# Altium PCB LANDING-STATION-PCB.PcbDoc
Units mm, origin at the board's own origin, x right, y up, seen from the top; angles counter-clockwise.
Board outline 100.5 x 100.5 mm, 2 copper layers (Top Layer, Bottom Layer); 59 components, 32 nets, 204 pads, 6 vias.
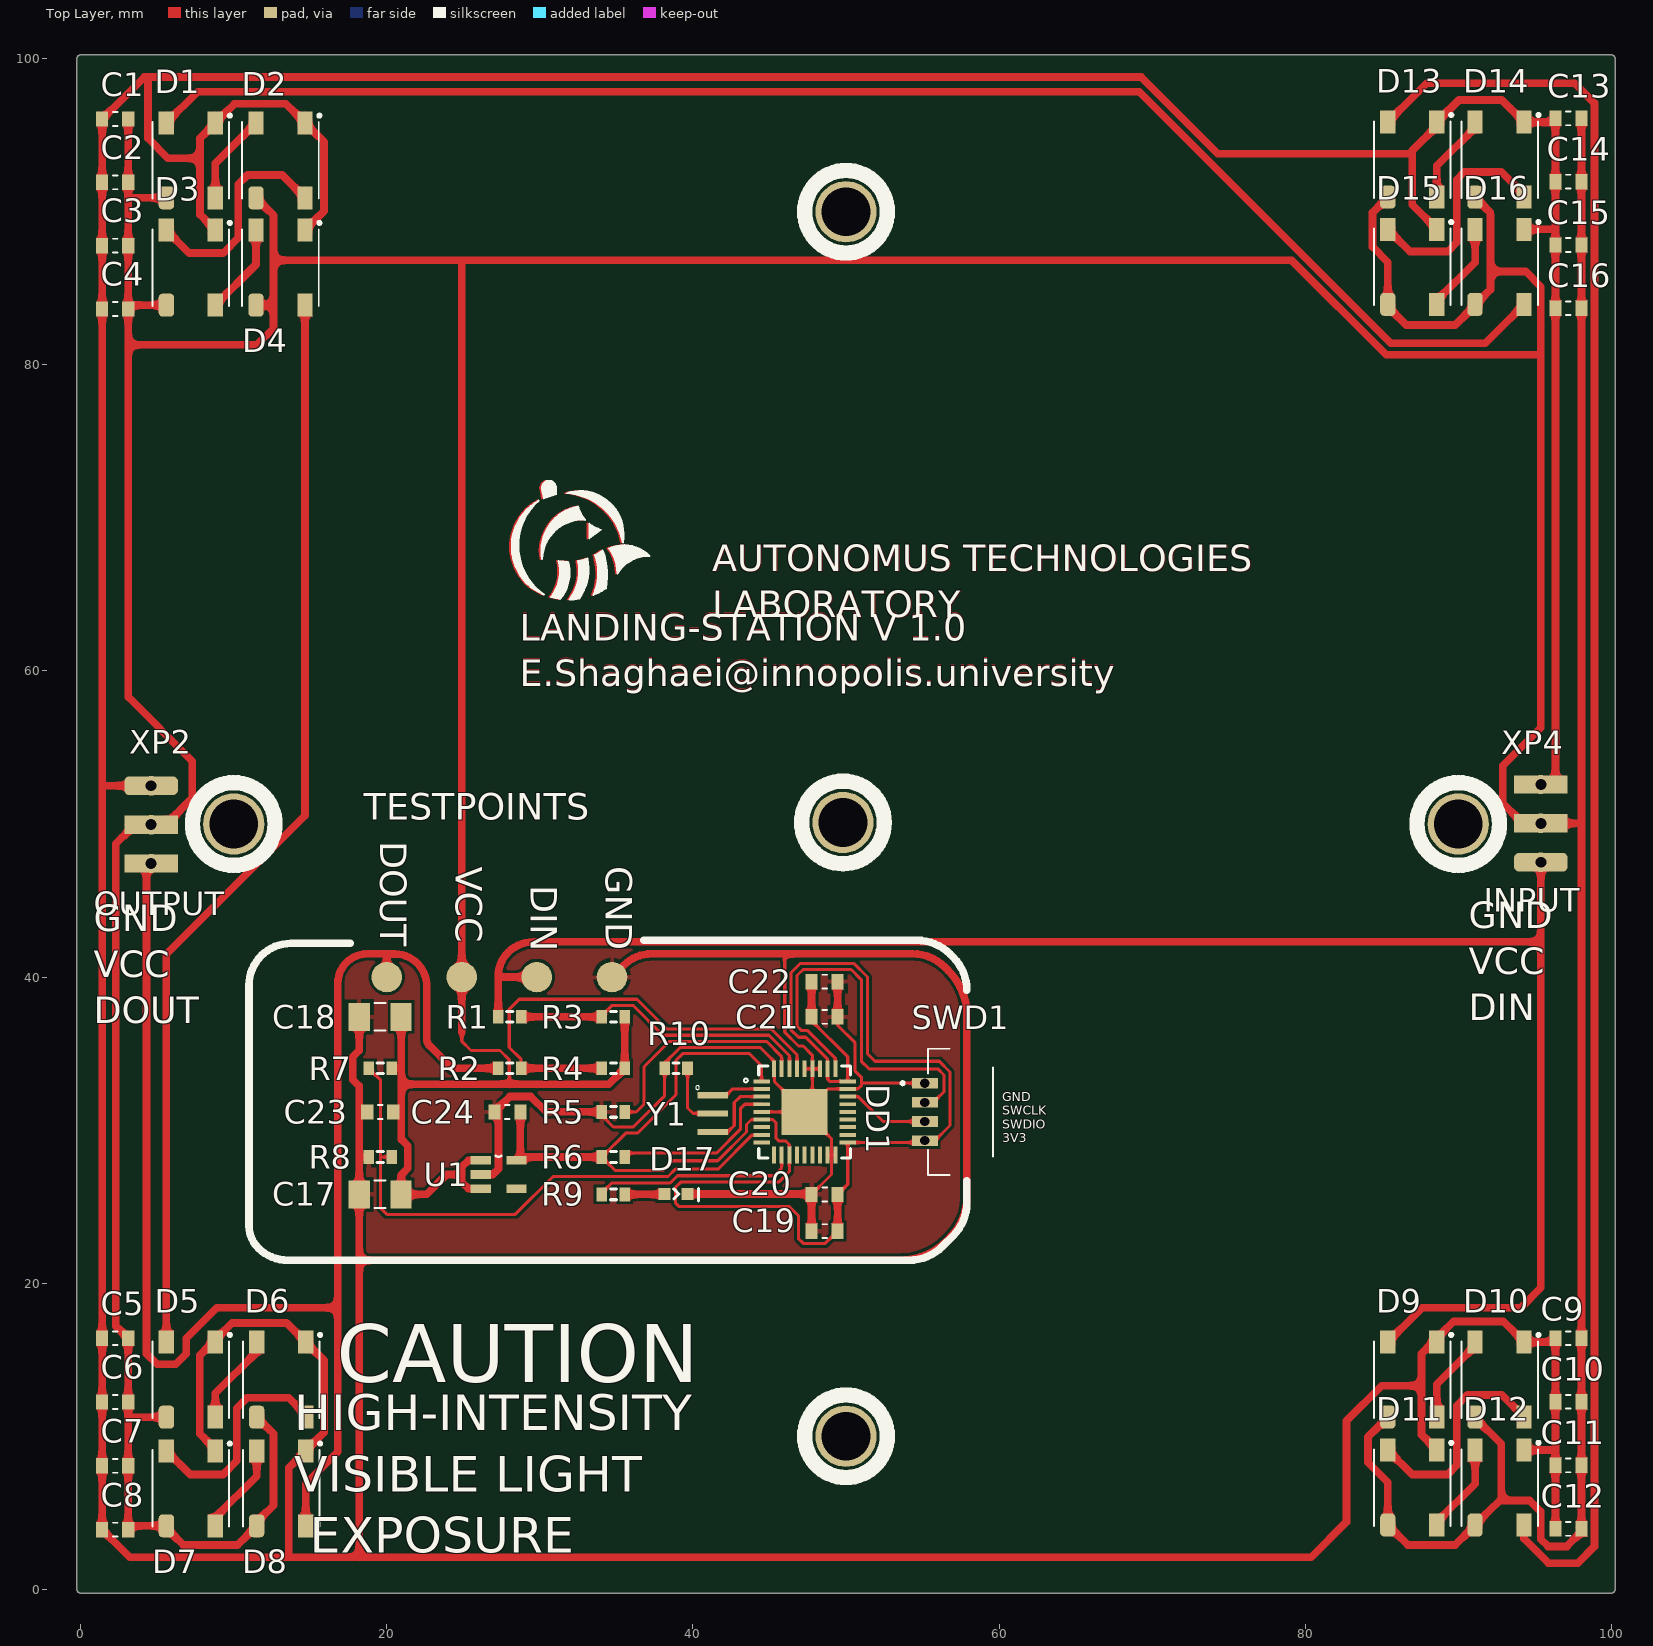
[diagram p0: Top Layer view]
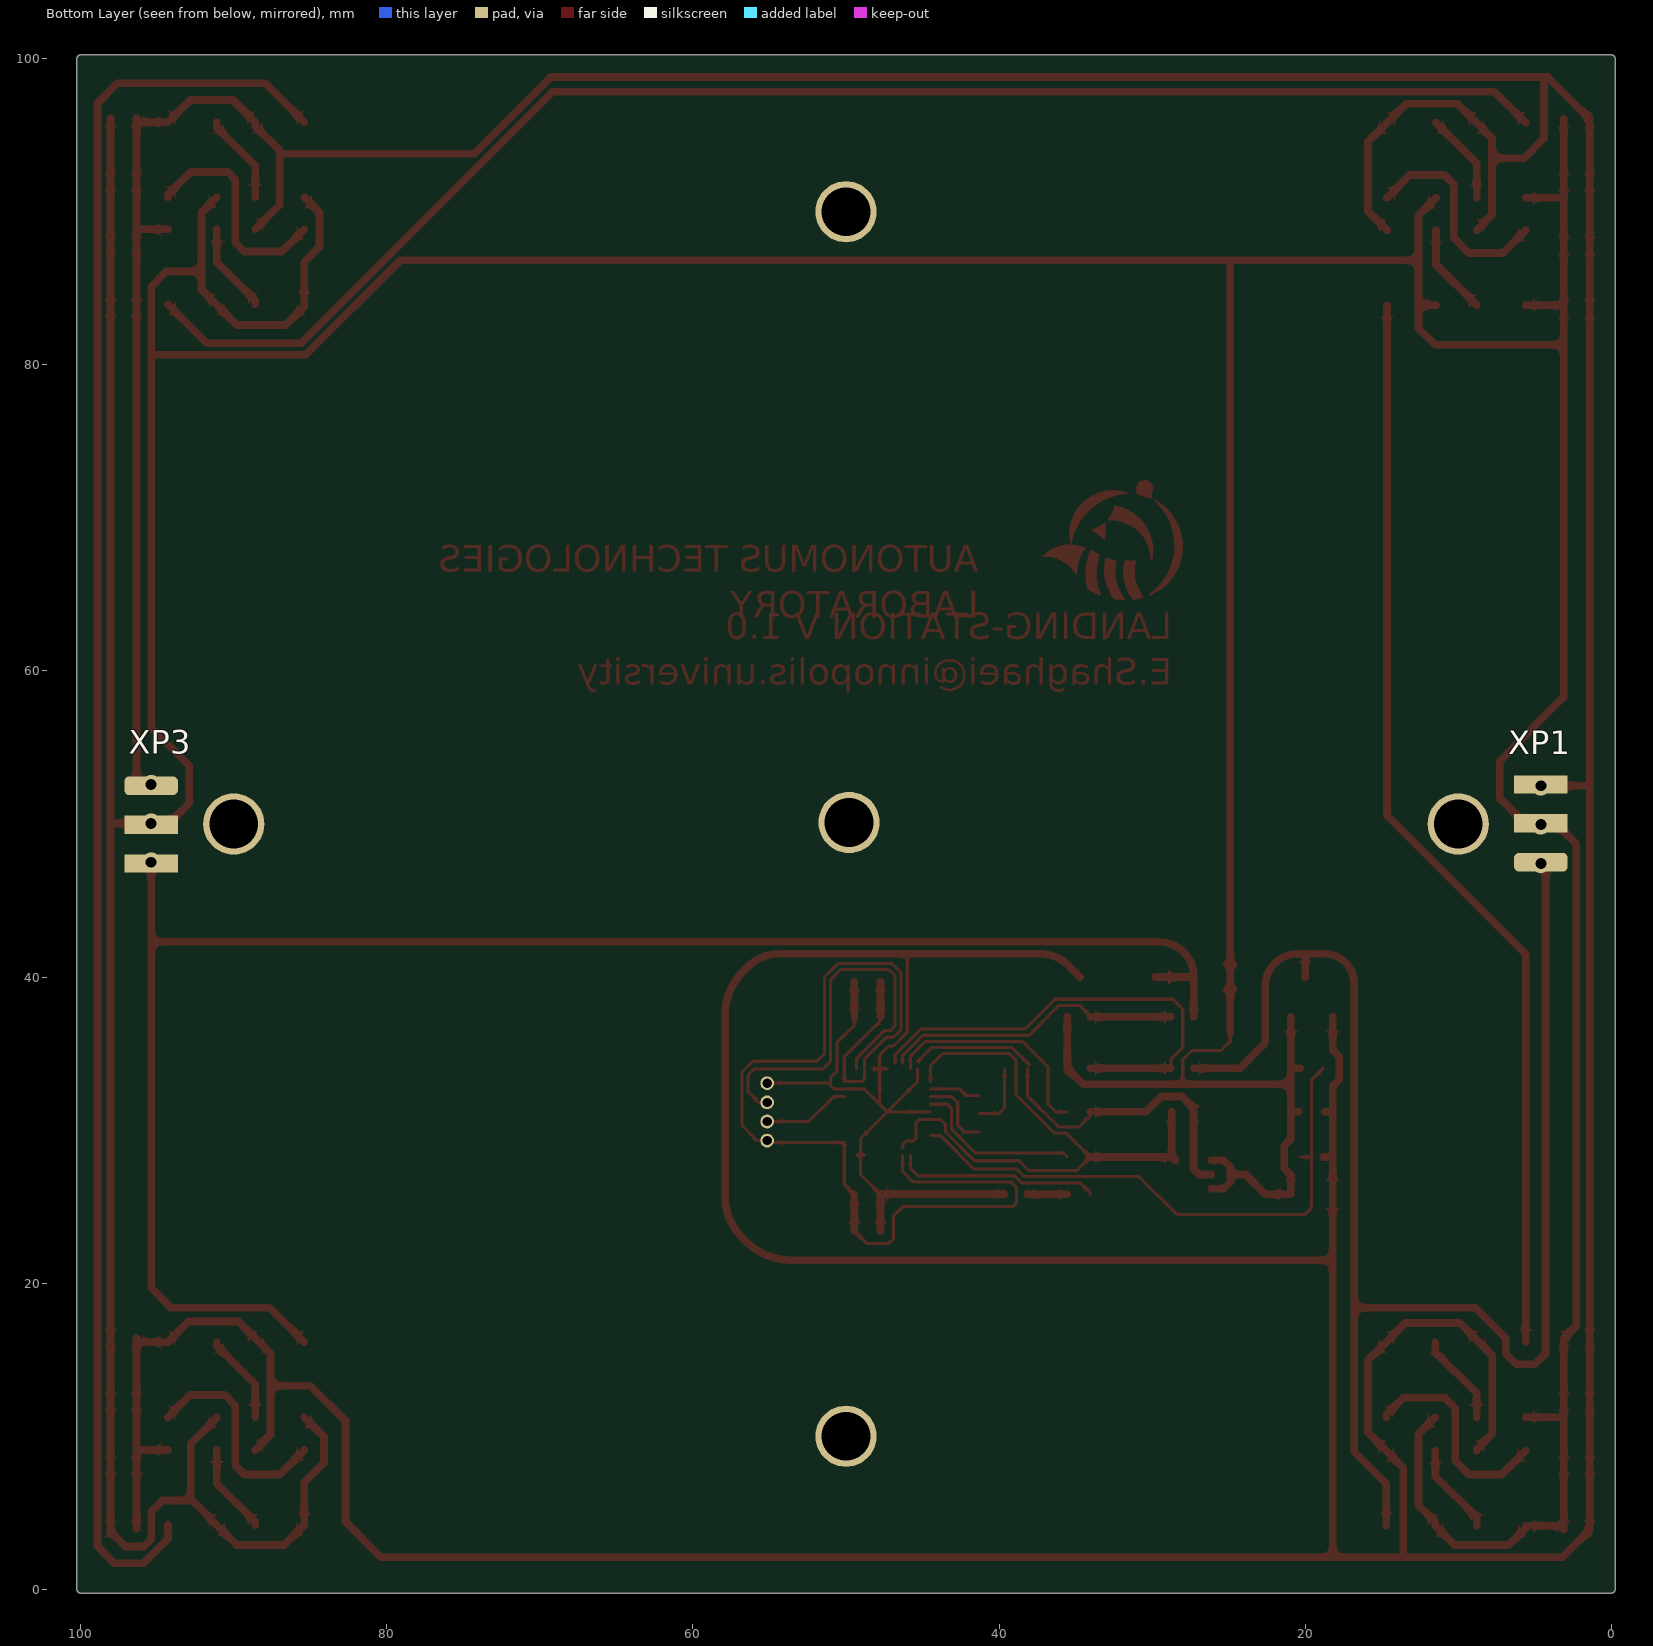
[diagram p1: Bottom Layer view, seen from below]
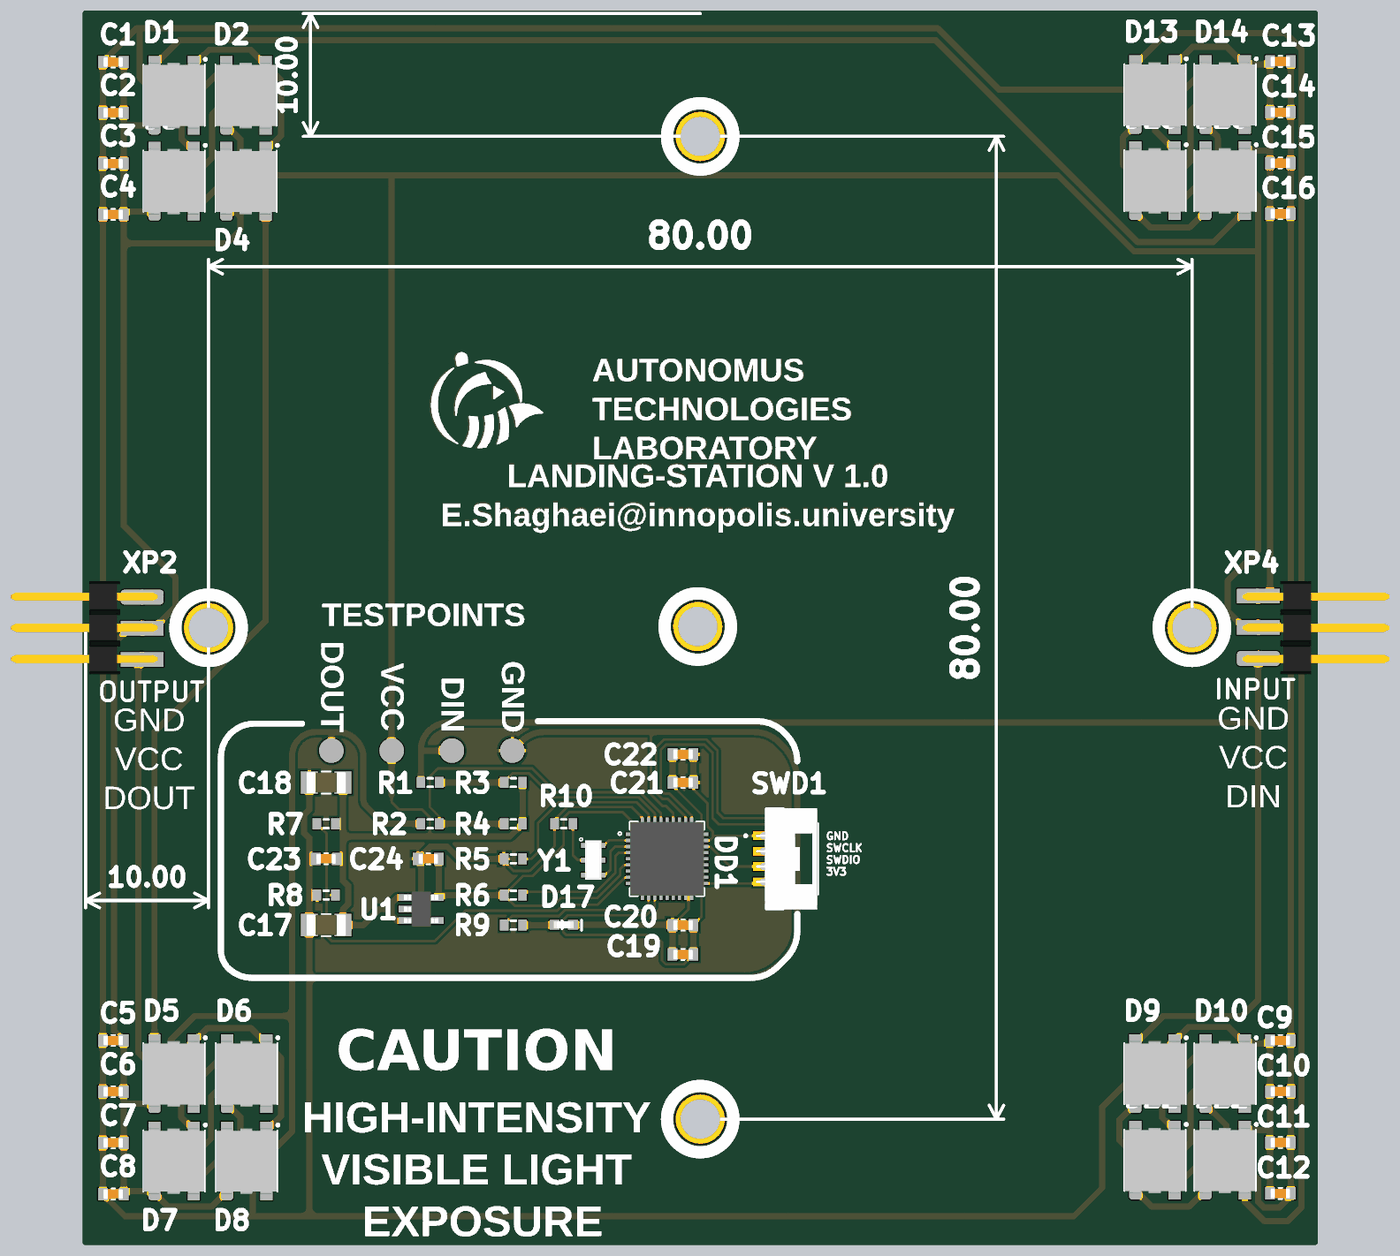
[diagram p2: 3D render of the assembled board from above, using the file's embedded part models]

## Layer stack, top to bottom
Top Solder: solder mask 0.0102, Solder Resist, Dk 3.5
Top Layer: signal copper 0.0356
Dielectric 1: dielectric 0.32, FR-4, Dk 4.8
Bottom Layer: signal copper 0.0356
Bottom Solder: solder mask 0.0102, Solder Resist, Dk 3.5

## Board outline
-0.25,0 ccw(c0,0) 0,-0.25 100,-0.25 ccw(c100,0) 100.25,0 100.25,100 ccw(c100,100) 100,100.25 0,100.25 ccw(c0,100) -0.25,100

## Design rules (kind name [scope] priority, off if disabled: settings)
Clearance [All] p1: gap=0.2 ignorepadtopadclearanceinfootprint=FALSE
PolygonConnect [All] p1: connectstyle=Relief reliefconductorwidth=0.254 reliefentries=4 polygonreliefangle="90 Angle" airgapwidth=0.254
RoutingVias [All] p1: holewidth=0.3 width=0.7 viastyle="Through Hole" minholewidth=0.3 minwidth=0.7 maxholewidth=1 maxwidth=1.5
SolderMaskExpansion [All] p1: expansion=0.102 istentingtop=FALSE
Width [All] p1: maxlimit=5 minlimit=0.17 preferedwidth=0.2
30 further rules are at their usual default settings.

## Components (designator, comment, footprint, x,y, rotation, side; value= is the part's Value field where it differs from the comment)
C1 "GX035C104MAT2-500" *CAPC1608X90 2.25,96.056 r180 top value=0.1u
C2 "GX035C104MAT2-500" *CAPC1608X90 2.25,91.921 r180 top value=0.1u
C3 "GX035C104MAT2-500" *CAPC1608X90 2.25,87.785 r180 top value=0.1u
C4 "GX035C104MAT2-500" *CAPC1608X90 2.25,83.65 r180 top value=0.1u
C5 "GX035C104MAT2-500" *CAPC1608X90 2.25,16.4 r180 top value=0.1u
C6 "GX035C104MAT2-500" *CAPC1608X90 2.25,12.233 r180 top value=0.1u
C7 "GX035C104MAT2-500" *CAPC1608X90 2.25,8.067 r180 top value=0.1u
C8 "GX035C104MAT2-500" *CAPC1608X90 2.25,3.9 r180 top value=0.1u
C9 "GX035C104MAT2-500" *CAPC1608X90 97.2,16.4 r180 top value=0.1u
C10 "GX035C104MAT2-500" *CAPC1608X90 97.2,12.25 r180 top value=0.1u
C11 "GX035C104MAT2-500" *CAPC1608X90 97.2,8.1 r180 top value=0.1u
C12 "GX035C104MAT2-500" *CAPC1608X90 97.2,3.95 r180 top value=0.1u
C13 "GX035C104MAT2-500" *CAPC1608X90 97.2,96.1 r180 top value=0.1u
C14 "GX035C104MAT2-500" *CAPC1608X90 97.2,91.967 r180 top value=0.1u
C15 "GX035C104MAT2-500" *CAPC1608X90 97.2,87.833 r180 top value=0.1u
C16 "GX035C104MAT2-500" *CAPC1608X90 97.2,83.7 r180 top value=0.1u
C17 "GRM31CR61A476KE15L" *CAPC3216X125N 19.569,25.8 r0 top value=47u
C18 "GRM31CR61A476KE15L" *CAPC3216X125N 19.569,37.4 r0 top value=47u
C19 "GX035C104MAT2-500" *CAPC1608X90 48.6,23.4 r180 top value=0.1u
C20 "GX035C104MAT2-500" *CAPC1608X90 48.6,25.8 r180 top value=0.1u
C21 "GX035C104MAT2-500" *CAPC1608X90 48.6,37.4 r0 top value=0.1u
C22 "GX035C104MAT2-500" *CAPC1608X90 48.6,39.7 r0 top value=0.1u
C23 "GX035C104MAT2-500" *CAPC1608X90 19.569,31.19 r180 top value=0.1u
C24 "GX035C104MAT2-500" *CAPC1608X90 27.879,31.19 r180 top value=0.1u
D1 "WS2812" LED_WS2812 7.2,93.356 r90 top
D2 "WS2812" LED_WS2812 13.053,93.356 r90 top
D3 "WS2812" LED_WS2812 7.2,86.35 r90 top
D4 "WS2812" LED_WS2812 13.053,86.35 r90 top
D5 "WS2812" LED_WS2812 7.2,13.7 r90 top
D6 "WS2812" LED_WS2812 13.1,13.7 r90 top
D7 "WS2812" LED_WS2812 7.2,6.6 r90 top
D8 "WS2812" LED_WS2812 13.1,6.6 r90 top
D9 "WS2812" LED_WS2812 87,13.7 r90 top
D10 "WS2812" LED_WS2812 92.7,13.7 r90 top
D11 "WS2812" LED_WS2812 87,6.65 r90 top
D12 "WS2812" LED_WS2812 92.7,6.65 r90 top
D13 "WS2812" LED_WS2812 87,93.4 r90 top
D14 "WS2812" LED_WS2812 92.7,93.4 r90 top
D15 "WS2812" LED_WS2812 87,86.4 r90 top
D16 "WS2812" LED_WS2812 92.7,86.4 r90 top
D17 "0603-LED-BLUE" *LEDM1608X80_LTE-C1906R-14(Primary) 38.9,25.824 r180 top
DD1 "STM32F103T8" *QFN50P600X600X100-37N 47.3,31.19 r0 top
R1 "Res3" J1-0603 28.029,37.4 r180 top value=330
R2 "Res3" J1-0603 28.029,34.04 r180 top value=330
R3 "Res3" J1-0603 34.8,37.4 r0 top value=10K
R4 "Res3" J1-0603 34.8,34.04 r0 top value=10K
R5 "RC0603FR-0710KL" J1-0603 34.8,31.19 r0 top value=10k
R6 "RC0603FR-0710KL" J1-0603 34.8,28.24 r0 top value=10k
R7 "RC0603FR-0710KL" J1-0603 19.569,34.04 r0 top value=10k
R8 "RC0603FR-0710KL" J1-0603 19.569,28.24 r0 top value=10k
R9 "Res3" J1-0603 34.8,25.8 r0 top value=330
R10 "RC0603FR-0710KL" J1-0603 38.9,34.04 r0 top value=0R
SWD1 "BM04B-GHS-TBT(LF)(SN)(N)" JST_BM04B-GHS-holes 58.5,31.19 r90 top
U1 "SPX3819M5-L-3-3/TR" *SOT95P280X145-5N 27.3,27.1 r0 top value=3V3
XP1 "Header 3" "HDR Side 3 pin" 4.602,50.04 r90 bottom
XP2 "Header 3" "HDR Side 3 pin" 4.602,49.96 r270 top
XP3 "Header 3" "HDR Side 3 pin" 95.398,49.96 r270 bottom
XP4 "Header 3" "HDR Side 3 pin" 95.398,50.04 r90 top
Y1 "CSTCE8M00G55-R0" *OSC_CSTCE8M00G55-R0 41.3,31.077 r270 top

## Footprints (in the part's own frame and the unit in brackets; to place one, negate y for a bottom-side part, rotate by r counter-clockwise, add the part's x,y. Pads: shape width x height; smd on the part's side, far side on the other; paste and mask are expansions set on the pad)
*CAPC1608X90 [mm]
  rect 0.8x1 smd: 1(-0.85,0) 2(0.85,0)
  silkscreen extent -0.15,-0.45 0.15,0.45, body extent -0.8,-0.4 0.8,0.41, height 0.88
*CAPC3216X125N [mm]
  rect 1.38x1.82 smd: 1(-1.369,0) 2(1.369,0)
  silkscreen extent -0.36,-0.9 0.36,0.9, body extent -1.6,-0.87 1.6,0.87, height 1.71
*LEDM1608X80_LTE-C1906R-14(Primary) [mm]
  rect 0.8x0.8 smd: A(0.75,0) C(-0.75,0)
  silkscreen extent -1.45,-0.38 0.16,0.45, body extent -0.8,-0.3 0.8,0.3, height 1.15
*OSC_CSTCE8M00G55-R0 [mm]
  rect 0.4x2 smd: 1(-1.2,0) 2(0,0) 3(1.2,0)
  silkscreen extent -1.83,-1.13 -1.57,-0.87, body extent -1.6,-0.65 1.6,0.65, height 1
*QFN50P600X600X100-37N [mm]
  rect 1.08x0.26 smd: 1(-2.815,2) 2(-2.815,1.5) 3(-2.815,1) 4(-2.815,0.5) 5(-2.815,0) 6(-2.815,-0.5) 7(-2.815,-1) 8(-2.815,-1.5) 9(-2.815,-2) 19(2.815,-2) 20(2.815,-1.5) 21(2.815,-1) 22(2.815,-0.5) 23(2.815,0) 24(2.815,0.5) 25(2.815,1) 26(2.815,1.5) 27(2.815,2)
  rect 0.26x1.08 smd: 10(-2,-2.815) 11(-1.5,-2.815) 12(-1,-2.815) 13(-0.5,-2.815) 14(0,-2.815) 15(0.5,-2.815) 16(1,-2.815) 17(1.5,-2.815) 18(2,-2.815) 28(2,2.815) 29(1.5,2.815) 30(1,2.815) 31(0.5,2.815) 32(0,2.815) 33(-0.5,2.815) 34(-1,2.815) 35(-1.5,2.815) 36(-2,2.815)
  rect 3x3 smd: ""(0,0)
  silkscreen extent -3.97,-3 3,3, body extent -3,-3 3,3, height 1
*SOT95P280X145-5N [mil]
  rect 52x22 smd: 1(-46,37) 2(-46,0) 3(-46,-37) 4(46,-37) 5(46,37)
  silkscreen extent -7,46 7,48, body extent -55,-57 55,57, height 57
"HDR Side 3 pin" [mm]
  rrect50% 1.2x3.5 smd: 1(-2.54,0)
  rect 1.2x3.5 smd: 2(0,0) 3(2.54,0)
  body extent -3.85,-10.67 3.77,1.27, height 1.57
J1-0603 [mm] "Chip Resistor, Body 1.6x0.8mm, IPC High Density"
  rect 0.7x0.9 smd: 1(-0.75,0) 2(0.75,0)
  silkscreen extent -0.2,-0.35 0.2,0.35, body extent -0.85,-0.48 0.85,0.48, height 0.9
JST_BM04B-GHS-holes [mm]
  rect 0.7x1.7 / inner rect 0.6x1.7 / far side round 0.9 hole 0.6: 1(1.875,3.35) 2(0.625,3.35) 3(-0.625,3.35) 4(-1.875,3.35)
  silkscreen extent -4.13,-1.1 4.13,4.9, body extent -4.12,-1.02 4.12,3.93, height 4.15
LED_WS2812 [mm]
  rrect50% 1.5x1 smd: 1(-2.45,1.6)
  rect 1.5x1 smd: 2(-2.45,-1.6) 3(2.45,-1.6) 4(2.45,1.6)
  silkscreen extent -2.5,-2.64 3.02,2.5, body extent -2.7,-2.45 2.65,2.5, height 1.5

## Part data
C1 C2 C3 C4 C5 C6 C7 C8 C9 C10 C11 C12 C13 C14 C15 C16 C19 C20 C21 C22 C23 C24: "Cap Thin Film 0.1uf 50v 0603", Package="0603 AVX", MF=AVX, Pacage Metric=1608, SnapEDA_Link=https://www.snapeda.com/parts/GX035C104MAT2-500/AVX/view-part/?ref=snap, Type=SMD
  C1 C2 C3 C4 C5 C6 C7 C8 C9 C10 C11 C12 C13 C14 C15 C16 C19 C20 C21 C22: MP="GX035C104MAT2-500 or CL10B104JB8NNNC"
  C23 C24: MP=GX035C104MAT2-500
C17 C18: "Multilayer Ceramic Capacitor, GRM Series, 47 - F, - 10%, X5R, 10 V, 1206 [3216 Metric]", Package="1206 Murata Electronics", MF="Murata Electronics", MP=GRM31CR61A476KE15L, SnapEDA_Link=https://www.snapeda.com/parts/GRM31CR61A476KE15L/Murata%20Electronics%20North%20America/view-part/?ref=snap, Type=SMD
D1 D2 D3 D4 D5 D6 D7 D8 D9 D10 D11 D12 D13 D14 D15 D16: "Addressable Lighting - 5 LED Discrete Serial _Shift Register_ Red, Green, Blue _RGB_ 5.00mm Dia", Package="SparkFun Electronics", Availability=Unavailable, ChipDip_Link=https://www.chipdip.ru/product/ws2812b, HelpURL=https://static.chipdip.ru/lib/554/DOC001554925.pdf, MF="SparkFun Electronics", MP=WS2812, Price=None, SnapEDA_Link=https://www.snapeda.com/parts/WS2812/SparkFun%20Electronics/view-part/106391/?ref=snap
D17: library part LTE-C1906R-14, "LED IrLED Chip LED 2-Pin SMD T/R", Package="0603 Lite-On", MP=0603-LED-BLUE, SnapEDA_Link=https://www.snapeda.com/parts/LTE-C1906R-14/Lite-On%20Inc./view-part/?ref=snap, Type=SMD
DD1: "STM32F103T8U6, Микроконтроллер 32BIT ARM 64K FLASH [VFQFPN-36]", Package=VFQFPN-36, ChipDip_Link=https://www.chipdip.ru/product/stm32f103t8u6-2, HelpURL=http://www.st.com/stonline/products/literature/ds/13587.pdf, MF=STM, MP=STM32F103T8U6, SnapEDA_Link=https://www.snapeda.com/parts/STM32F103T8U6TR/STMicroelectronics/view-part/?ref=search&t=STM32F103T8U6, Type=SMD
R1 R2 R3 R4 R9: "Resistor", Package=R0603, Pacage Metric=1608, Type=SMD
  R1 R2 R3 R4: ChipDip_Link=https://www.chipdip.ru/product0/9000079736, HelpURL=https://www.chipdip.ru/product0/9000079736, MP="4.7K 1% 0603"
  R9: ChipDip_Link=https://www.chipdip.ru/product0/9000079628, HelpURL=https://www.chipdip.ru/product0/9000079628, MP=RC0603FR-07330RL
R5 R6 R7 R8 R10: "10 kOhms 1 0.1 W 1 10 W Chip Resistor 0603 1608 Metric Thick Film", Package=R0603, ChipDip_Link=https://www.chipdip.ru/product0/9000079736, HelpURL=https://www.chipdip.ru/product0/9000079736, MF="Yageo or NXP", MP="10K 1% 0603", Pacage Metric=1608, SnapEDA_Link=https://www.snapeda.com/parts/RC0603FR-0710KL/Yageo/view-part/?ref=dk&t=RC0603FR-0710KL&con_ref=None, Type=SMD
SWD1: "Conn Shrouded Header HDR 4 POS 1.25mm Solder ST SMD Reel", Package=None, Instructions="Do not install", MF="JST Sales", MP=SM04B-GHS-TB(LF)(SN), SnapEDA_Link=https://www.snapeda.com/parts/BM04B-GHS-TBT%28LF%29%28SN%29%28N%29/JST%20Sales%20America%20Inc./view-part/?ref=snap, System=Connector, Type=SMD
U1: library part SPX3819M5-L, "Low Dropout Voltage Regulator, Adjustable 0.5A, В±1%, 2.5 to 16 Vin, 5-Pin SOT-23", Package="SOT-23-5 Exar", ChipDip_Link=https://www.chipdip.ru/product1/8003455237, HelpURL=http://www.farnell.com/datasheets/2614478.pdf, MF="MaxLinear, Inc.", MP=SPX3819M5-L-3-3/TR, SnapEDA_Link=https://www.snapeda.com/parts/SPX3819M5-L/MaxLinear%2C%20Inc./view-part/?ref=snap, Type=SMD
XP1 XP2 XP3 XP4: "Header, 3-Pin", LatestRevisionDate=17-Jul-2002, LatestRevisionNote="Re-released for DXP Platform.", Publisher="Altium Limited"
Y1: "Ceramic Resonator 8MHz ??0.5% _Tol_ ??0.2% _Stability_ 33pF 40Ohm 3-Pin CSMD T/R", Package="SMD-3 Murata", ChipDip_Link=https://www.chipdip.ru/product1/8001783721, HelpURL=https://www.murata.com/en-eu/api/pdfdownloadapi?cate=&partno=CSTCE8M00G55-R0, MF=Murata, MP=CSTCE8M00G55-R0, SnapEDA_Link=https://www.snapeda.com/parts/CSTCE8M00G55-R0/Murata%20Electronics%20North%20America/view-part/?ref=snap, Type=SMD

## Free pads (board coordinates)
  round 2 smd: 5(29.8,40) 6(19.998,40) 8(24.899,40) 9(34.71,40)
  round 4 hole 3.2: ""(10,50) ""(49.8,50.1) ""(50,10) ""(50,90) ""(90,50)

## Via types
v1: diameter 1.27, hole 0.711, Top Layer to Bottom Layer, 6 vias

## Nets (pads, with @x,y where several pads share a name; then routed paths per layer and width w, separated by ;. In a path a pad name is that pad's centre, name@x,y a point inside that pad or via, vN(x,y) a via of type N, cw(c..) or ccw(c..) an arc to the next point about the centre after c; other vN are vias at no path point)
3.3: C19.1 C20.1 C21.1 C22.1 C24.1 DD1.1 DD1.6 DD1.12 DD1.19 DD1.27 DD1.29 R6.1 SWD1.4 U1.5 | length 113.5
  Top Layer w0.2: DD1.1 44.485,34.215 43.7,35 39.333,35 38.895,34.562 38.895,32.316 36.379,29.8 35.61,29.8 R6.1 34.923,27.367 38.067,27.367 38.7,28 41.617,28 43.5,29.883 43.5,30.364 43.826,30.69 DD1.6 45.218,30.69 45.415,30.493 45.415,29.485 45.6,29.3 46.048,29.3 46.304,29.044 DD1.12@46.304,28.826 ; DD1.12 46.3,27.3 45.6,26.6 39.2,26.6 38.85,26.25 38.85,25.25 39.1,25 46.3,25 46.9,24.4 46.9,22.9 47.2,22.6 48.65,22.6 C19.1 ; C21.1 47.75,37.15 50.115,34.785 DD1.27 50.105,33.2 50.07,33.165 48.959,33.165 48.8,33.324 DD1.29 48.8,34.634 47.4,36.034 47.367,36.067 46.899,36.067 46.4,36.566 46.4,40.266 46.934,40.8 47.034,40.9 50.5,40.9 51.4,40 51.4,35 51.9,34.5 56.1,34.5 56.8,33.8 56.8,30.3 55.815,29.315 SWD1.4 55.025,29.19 DD1.19 50.115,26.465 C20.1
  Top Layer w0.5: U1.5 U1.5@28.669,28.24 ; C24.1 28.729,28.3 U1.5@28.669,28.24 ; R6.1 U1.5@28.669,28.24 ; C21.1 C22.1 ; C19.1 C20.1
ADC_5V: DD1.8 R7.1 R8.2 | length 37.4
  Top Layer w0.2: R7.1 19.6,33.259 19.6,28.2 ; R8.2 19.64,28.24 19.6,28.2 ; DD1.8 44.455,29.66 43.843,29.66 41.635,27.453 38.853,27.453 38.367,26.967 30.867,26.967 28.4,24.5 20,24.5 19.6,24.9 19.6,28.2
BOOT0: DD1.35 R5.2 | length 14.8
  Top Layer w0.2: R5.2 36.29,31.19 36.8,31.7 36.8,34.134 38.466,35.8 44.8,35.8 45.8,34.8 DD1.35
DIN: D9.4 pad.5 R1.2 XP3.3 XP4.1 | length 113.9
  Top Layer w0.5: R1.2 27.279,40.062 ; pad.5 27.429,40 cw(c27.429,40.212) 27.279,40.062 ; D9.4 87.65,18.4 94.1,18.4 95.398,19.698 95.398,42.3 ; v1(95.398,47.5) 95.398,42.3 ; 27.279,40.062 cw(c29.465,40.062) 27.919,41.608 cw(c29.59,39.937) 29.59,42.3 95.398,42.3
DOUT: D8.2 pad.6 R2.2 XP1.1 XP2.3 | length 101.9
  Top Layer w0.5: v1(4.602,47.42) 4.3,47.118 4.3,15.4 5,14.7 6.2,14.7 6.9,15.4 6.9,16.4 8.9,18.4 16.8,18.4 ; D8.2 14.7,6.9 16.8,9 16.8,18.4 ; pad.6 19.998,41.398 20,41.4 ; 20,41.504 20.522,41.504 cw(c20.522,39.42) 22.6,39.576 22.6,35.983 ccw(c23.283,35.983) 22.8,35.5 24.26,34.04 R2.2 ; 20,41.516 18.719,41.516 ccw(c18.719,39.597) 16.8,39.588 16.8,18.4
GND: C1.2 C2.2 C3.2 C4.2 C5.2 C6.2 C7.2 C8.2 C9.2 C10.2 C11.2 C12.2 C13.2 C14.2 C15.2 C16.2 C17.1 C18.1 C19.2 C20.2 C21.2 C22.2 C23.2 C24.2 D1.3 D2.3 D3.3 D4.3 D5.3 D6.3 D7.3 D8.3 D9.3 D10.3 D11.3 D12.3 D13.3 D14.3 D15.3 D16.3 D17.C DD1. DD1.5 DD1.17 DD1.18 DD1.26 DD1.30 DD1.31 DD1.32 DD1.36 pad.9 R5.1 R8.1 R10.1 SWD1.1 U1.2 XP1.3 XP2.1 XP3.1 XP4.3 | length 633
  Top Layer w0.2: R5.1 34.05,30.95 34.8,30.2 36.1,30.2 38.15,32.25 R10.1 ; R10.1@38.029,34.261 39.168,35.4 44.4,35.4 DD1.36@45.328,34.472 ; DD1.5 DD1. ; DD1.36@45.325,34.005 45.325,33.165 DD1. ; 45.985,41.564 cw(c45.949,41.528) 46,41.528 46,41.516 46,36.4 46.9,35.5 47.2,35.5 47.8,34.9 DD1.31 ; DD1.32 DD1.31 ; C20.2 49.05,27.1 49.05,28.375 ; DD1.30 DD1.31 ; DD1.17 49.05,28.375 ; DD1.18 49.05,28.375 ; C21.2 49.45,36.85 50.6,35.7 50.6,33.851 51.025,33.427 51.025,33.065 ; SWD1.1 51.025,33.065 ; DD1. DD1.@47.8,31.69 ; DD1. 49.05,29.44 49.05,28.375 ; DD1.@47.8,31.69 48.8,32.69 DD1.26 50.773,32.69 51.025,32.942 51.025,33.065 ; DD1.@47.8,31.69 DD1.31
  Top Layer w0.5: v1(4.602,52.5) 1.5,52.5 1.4,52.4 ; D7.3 8.8,9.146 7.776,10.17 7.776,15.276 9.904,17.404 13.446,17.404 D6.3 15.9,14.95 15.9,10.25 D8.3 13.6,7.95 13.6,2.2 ; D3.3 7.8,89.8 7.8,89.944 7.796,89.948 7.796,93.5 ; D4.3 15.9,90.047 15.9,94.559 D2.3 13.399,97.06 10.054,97.06 D1.3 7.796,94.802 7.796,93.5 ; C18.1 18.2,35.19 18.179,35.19 17.769,34.78 17.769,33.3 18.179,32.89 18.2,32.89 18.2,31.2 ; C23.2 18.21,31.19 18.2,31.2 ; R8.1 18.24,28.24 18.2,28.2 ; U1.2 26.915,27.1 27.3,27.485 27.3,31.461 28.032,32.193 29.407,32.193 30.41,31.19 R5.1 ; pad.9 35.482,40.772 cw(c37.278,38.976) 37.278,41.516 45.985,41.516 46,41.516 54.367,41.516 cw(c54.367,38.58) 56.444,40.656 56.7,40.4 cw(c53.803,37.503) 57.9,37.503 57.9,25.656 cw(c54.144,25.656) 56.8,23 56.544,22.744 cw(c53.541,25.747) 53.541,21.5 18.2,21.5 ; D17.C 47.726,25.824 C20.2 C19.2 ; C21.2 C22.2 ; 86.9,93.8 74.3,93.8 69.3,98.8 4.5,98.8 ; D11.3 87.6,10.1 87.6,10.287 87.596,10.291 87.596,13.3 ; D15.3 87,90.45 87,94 88.6,95.6 D13.3 90.05,97.3 92.85,97.3 D14.3 96.1,95.85 C13.2 C14.2 96.35,88.8 ; D12.3 96.25,9.1 96.35,9.2 ; D16.3 96.3,88.85 96.35,88.8 ; v1(95.398,52.58) 96.35,52.58 C16.2 C15.2 96.35,88.8 ; C12.2 C11.2 96.35,9.2 ; 1.4,52.4 C4.2 C3.2 C2.2 C1.2 4.144,98.8 4.5,98.8 ; 1.4,52.4 C5.2 C6.2 C7.2 C8.2 3.2,2.1 13.6,2.1 18.2,2.1 ; 4.5,98.8 4.4,98.7 4.4,94.8 5.7,93.5 7.796,93.5 ; 18.2,2.1 18.2,21.5 ; 18.2,2.1 80.4,2.1 82.7,4.4 82.7,11 85,13.3 87.596,13.3 ; 18.2,21.5 C17.1 18.2,28.2 ; 18.2,28.2 18.2,31.2 ; 87.596,13.3 87.596,15.396 88.6,16.4 89.7,17.5 92.95,17.5 D10.3 96.1,16.15 C9.2 C10.2 96.35,9.2
LED1: DD1.11 R9.1 | length 13.4
  Top Layer w0.2: R9.1 34.05,25.9 34.694,26.544 35.07,26.544 35.076,26.55 36.024,26.55 38.516,26.55 38.986,27.021 45.302,27.021 45.8,27.519 DD1.11
NetD1_2: D1.2 D2.4 | length 6
  Top Layer w0.5: D1.2 8.8,93.153 D2.4
NetD1_4: D1.4 D16.2 | length 97.4
  Top Layer w0.5: D1.4 7.64,97.847 69.153,97.847 85.6,81.4 91.75,81.4 D16.2
NetD2_2: D2.2 D3.4 | length 14.5
  Top Layer w0.5: D3.4 7.1,87.3 9.3,87.3 10.3,88.3 10.3,91.8 10.9,92.4 13.159,92.4 D2.2
NetD3_2: D3.2 D4.4 | length 6
  Top Layer w0.5: D3.2 11.453,86.553 D4.4
NetD4_2: D4.2 D5.4 | length 71.5
  Top Layer w0.5: D5.4 5.6,41.5 14.653,50.553 D4.2
NetD5_2: D5.2 D6.4 | length 6
  Top Layer w0.5: D5.2 8.8,12.8 11.5,15.5 D6.4
NetD6_2: D6.2 D7.4 | length 14.4
  Top Layer w0.5: D7.4 7.15,7.5 9.3,7.5 10.2,8.4 10.2,11.838 10.87,12.509 13.598,12.509 14.7,11.406 D6.2
NetD7_2: D7.2 D8.4 | length 6
  Top Layer w0.5: D7.2 8.8,4.7 11.5,7.4 D8.4
NetD9_2: D9.2 D10.4 | length 5.9
  Top Layer w0.5: D9.2 88.6,13.4 91.1,15.9 D10.4
NetD10_2: D10.2 D11.4 | length 14.6
  Top Layer w0.5: D11.4 87,7.5 89.3,7.5 89.9,8.1 89.9,12 90.6,12.7 92.85,12.7 D10.2
NetD11_2: D11.2 D12.4 | length 5.9
  Top Layer w0.5: D11.2 88.6,4.4 91.1,6.9 D12.4
NetD12_2: D12.2 D13.4 | length 116
  Top Layer w0.5: D13.4 87.95,98.4 97.6,98.4 98.9,97.1 98.9,2.8 97.8,1.7 95.9,1.7 94.3,3.3 D12.2
NetD13_2: D13.2 D14.4 | length 5.9
  Top Layer w0.5: D13.2 88.6,93 91.1,95.5 D14.4
NetD14_2: D14.2 D15.4 | length 14.8
  Top Layer w0.5: D15.4 86.85,87.4 89.3,87.4 89.9,88 89.9,92.1 90.4,92.6 92.8,92.6 94.3,91.1 D14.2
NetD15_2: D15.2 D16.4 | length 5.9
  Top Layer w0.5: D15.2 88.6,84.2 91.1,86.7 D16.4
NetD17_A: D17.A R9.2 | length 2.6
  Top Layer w0.5: R9.2 38.126,25.8 D17.A
NetDD1_2: DD1.2 Y1.1 | length 3.4
  Top Layer w0.2: Y1.1 42.177,32.277 42.6,32.7 44.475,32.7 DD1.2
NetDD1_3: DD1.3 Y1.3 | length 5
  Top Layer w0.2: Y1.3 42.277,29.877 42.7,30.3 42.7,31.8 43.09,32.19 DD1.3
NetR10_2: R10.2 Y1.2 | length 4.4
  Top Layer w0.2: R10.2 39.65,31.45 40,31.1 41.277,31.1 Y1.2
NRST: DD1.4 R6.2 | length 11.2
  Top Layer w0.2: R6.2 35.81,28.5 41.548,28.5 43.1,30.052 43.1,31.4 43.39,31.69 DD1.4
SCL/A2: DD1.33 R2.1 R4.1 | length 30.6
  Top Layer w0.2: R2.1 28.779,34.621 28,35.4 28,37.9 28.65,38.55 36.35,38.55 38.3,36.6 45.131,36.6 46.801,34.93 DD1.33@46.801,34.377
  Top Layer w0.5: R2.1 R4.1
SDA/A1: DD1.34 R1.1 R3.1 | length 19.7
  Top Layer w0.2: R3.1 34.05,37.479 34.721,38.15 36.079,38.15 38.029,36.2 44.966,36.2 46.308,34.858 DD1.34@46.308,34.363
  Top Layer w0.5: R1.1 R3.1
SWDIO: DD1.25 SWD1.3 | length 5.7
  Top Layer w0.2: DD1.25 50.81,32.19 52.435,30.565 SWD1.3
SWLK: DD1.28 SWD1.2 | length 25.7
  Top Layer w0.2: DD1.28 49.3,34.7 47.5,36.5 47.1,36.5 46.8,36.8 46.8,40.1 47.2,40.5 50.334,40.5 51,39.834 51,34.5 51.5,34 56,34 56.4,33.6 56.4,32.5 55.715,31.815 SWD1.2
VCC: C1.1 C2.1 C3.1 C4.1 C5.1 C6.1 C7.1 C8.1 C9.1 C10.1 C11.1 C12.1 C13.1 C14.1 C15.1 C16.1 C17.2 C18.2 C23.1 D1.1 D2.1 D3.1 D4.1 D5.1 D6.1 D7.1 D8.1 D9.1 D10.1 D11.1 D12.1 D13.1 D14.1 D15.1 D16.1 pad.8 R3.2 R4.2 R7.2 U1.1 U1.3 XP1.2 XP2.2 XP3.2 XP4.2 | length 513
  Top Layer w0.2: 24.9,36.4 24.9,35.8 25.5,35.2 27.4,35.2 28,34.6 28,33
  Top Layer w0.5: C1.1 C2.1 3.1,90.9 ; D5.1 3.25,11.25 3.1,11.1 ; D3.1 3.35,83.9 C4.1 ; D1.1 3.106,90.906 3.1,90.9 ; D4.1 12.6,83.9 ; D2.1 12.6,89.759 12.6,86.83 ; D6.1 12.6,10.15 12.6,5.5 11.5,4.4 D8.1 10.25,2.9 9.513,2.9 9.509,2.896 8.091,2.896 8.087,2.9 6.7,2.9 5.6,4 D7.1 3.35,4.15 C8.1 C7.1 3.1,11.1 ; R7.2 20.878,34.04 20.938,34.1 ; C23.1 20.828,31.19 20.938,31.3 ; C18.2 20.938,34.1 ; 24.9,36.4 24.9,86.73 25,86.83 ; U1.3 25.34,26.16 24.9,26.6 24.9,27.1 ; U1.1 25.34,28.04 24.9,27.6 24.9,27.1 ; R3.2 R4.2 34.51,33 28,33 20.938,33 ; D9.1 84.1,9.95 84.1,8.3 85.4,7 D11.1 86.7,2.9 89.8,2.9 D12.1 92.1,5.2 92.7,5.8 92.8,5.8 ; D13.1 84.4,89.95 84.4,89.813 84.396,89.809 84.396,87.891 84.4,87.887 84.4,87.7 85.4,86.7 D15.1 85.4,83.8 86.6,82.6 89.8,82.6 92.104,84.904 92.104,86.1 ; D10.1 91.1,11.2 92.8,9.5 92.8,5.8 ; D14.1 92.1,89.95 92.1,89.813 92.104,89.809 92.104,86.1 ; XP4.2@93.867,50.398 92.9,51.365 92.9,53.8 95.394,56.294 95.394,80.7 ; v1(95.398,50.04) 97.79,50.04 ; C13.1 C14.1 C15.1 C16.1 C9.1 C10.1 C11.1 C12.1 98.05,3.75 97.1,2.8 95.866,2.8 95.383,3.283 95.383,5.08 94.663,5.8 92.8,5.8 ; 3.1,11.1 C6.1 C5.1 2.3,17.2 2.3,48.7 3.56,49.96 v1(4.602,49.96) 5.56,49.96 7.3,51.7 7.3,54.1 3.1,58.3 3.1,81.3 ; 3.1,81.3 C4.1 ; 3.1,81.3 11.5,81.3 12.6,82.4 12.6,83.9 ; C4.1 C3.1 3.1,90.9 ; 12.6,83.9 12.6,86.83 ; 12.6,86.83 25,86.83 ; 20.938,31.3 20.938,33 ; 20.938,31.3 20.938,29.39 20.959,29.39 21.369,28.98 21.369,27.5 20.959,27.09 20.938,27.09 C17.2 22.6,25.8 23.9,27.1 24.9,27.1 ; 20.938,33 20.938,34.1 ; 25,86.83 79.104,86.83 85.288,80.646 95.34,80.646 95.394,80.7 ; 92.104,86.1 94.4,86.1 95.394,85.106 95.394,80.7
pads on no net: DD1.7 DD1.9 DD1.10 DD1.13 DD1.14 DD1.15 DD1.16 DD1.20 DD1.21 DD1.22 DD1.23 DD1.24 U1.4
copper on no net: | length 69
  Top Layer w0.01: 29.977,71.933 30.105,71.244 30.988,71.54 30.992,71.933 ; 29.978,71.892 cw(c30.484,71.933) 30.989,71.883
  Top Layer w0.127: 29.285,65.489 cw(c31.492,68.129) 29.805,71.127 ccw(c32.391,68.201) 30.148,65.004 cw(c31.81,68.969) 29.285,65.489 ; 30.036,67.315 cw(c32.959,67.842) 32.389,70.757 ccw(c34.467,71.287) 32.852,69.876 ccw(c32.698,67.215) 30.036,67.315 ; 30.628,64.835 ccw(c28.415,66.527) 31.119,67.199 ccw(c31.791,70.751) 31.737,67.136 cw(c29.183,66.414) 31.218,64.71 cw(c31.81,68.969) 30.628,64.835 ; 31.625,71.608 cw(c31.407,67.637) 35.31,68.401 ccw(c32.525,68.921) 31.625,71.608 ; 31.824,64.67 ccw(c31.81,68.969) 32.451,64.718 ccw(c29.781,66.646) 33,67.344 cw(c31.791,70.751) 32.395,67.186 cw(c29.305,66.564) 31.824,64.67 ; 33.117,68.664 33.117,69.621 ccw(c34.467,71.287) 33.883,69.223 33.117,68.664 ; 33.399,64.974 ccw(c30.111,66.396) 33.497,67.563 ccw(c31.791,70.751) 33.99,67.881 cw(c29.888,66.276) 34.204,65.398 cw(c31.81,68.969) 33.399,64.974 ; 34.42,68.014 cw(c32.018,66.313) 34.961,66.376 cw(c36.978,65.133) 37.055,67.501 ccw(c35.377,65.905) 34.42,68.014

## Polygon pours and split planes (outlines as drawn)
GND on Top Layer "GND_L01_P000" (solid, remove dead copper, pour order 0): 16.9,21.542 35.315,21.557 54.294,21.542 55.085,21.85 ccw(c54.615,24.108) 56.544,22.844 57.5,23.8 cw(c58.937,23.405) 58.2,24.7 58.2,38.758 57.4,39.5 ccw(c56.435,39.5) 57.117,40.183 55.6,41.7 cw(c55.359,41.941) 55.359,41.6 40,41.6 cw(c39.759,41.841) 39.759,41.5 38,41.5 cw(c38.241,41.259) 38.241,41.6 39.2,41.6 38.854,41.946 ccw(c38,41.093) 38,42.3 27.549,42.3 ccw(c27.548,40.252) 26.1,41.7 cw(c25.859,41.941) 25.859,41.6 19.052,41.6 ccw(c19.052,39.06) 17.256,40.856 17,40.6

## Other copper
Top Layer:
  region: 30.148,65.004 cw(c31.81,68.969) 29.285,65.489 cw(c31.492,68.129) 29.805,71.127 ccw(c32.391,68.201)
  region: 30.628,64.835 ccw(c31.81,68.969) 31.218,64.71 ccw(c29.183,66.414) 31.737,67.136 cw(c31.791,70.751) 31.119,67.199 cw(c28.415,66.527)
  region: 33.883,69.223 cw(c34.467,71.287) 33.117,69.621 33.117,68.664
  region: 33.399,64.974 ccw(c31.81,68.969) 34.204,65.398 ccw(c29.888,66.276) 33.99,67.881 cw(c31.791,70.751) 33.497,67.563 cw(c30.111,66.396)
  region: 30.036,67.315 cw(c32.959,67.842) 32.389,70.757 ccw(c34.467,71.287) 32.852,69.876 ccw(c32.698,67.215)
  region: 31.824,64.67 ccw(c31.81,68.969) 32.451,64.718 ccw(c29.781,66.646) 33,67.344 cw(c31.791,70.751) 32.395,67.186 cw(c29.305,66.564)
  region: 34.961,66.376 ccw(c32.018,66.313) 34.42,68.014 cw(c35.377,65.905) 37.055,67.501 ccw(c36.978,65.133)
  region: 30.099,71.243 29.98,71.887 cw(c29.978,71.892) 29.973,71.891 cw(c30.484,71.933) 30.997,71.933 cw(c30.992,71.933) 30.997,71.933 cw(c30.484,71.933) 30.997,71.923 30.997,71.933 ccw(c30.484,71.933) 30.997,71.933 30.997,71.923 30.993,71.54 ccw(c30.988,71.54) 30.993,71.54 cw(c30.988,71.54) 30.99,71.535 30.106,71.239 cw(c30.105,71.244)
  region: 35.31,68.401 ccw(c32.525,68.921) 31.625,71.608 cw(c31.407,67.637)
  region net GND: 45.325,33.585 ccw(c45.548,33.362) 45.233,33.362 45.233,33.353 ccw(c45.079,33.353) 45.188,33.461 45.174,33.475 45.255,33.556 cw(c45.325,33.486)
  region net 3.3: 49.515,33.165 49.515,33.167 49.658,33.31 49.655,33.314 cw(c49.451,33.44) 49.451,33.261 49.42,33.261 49.42,33.26
  text "AUTONOMUS TECHNOLOGIES / LABORATORY" at 41.331,62.898 h3
  text "LANDING-STATION V 1.0 / E.Shaghaei@innopolis.university" at 28.687,58.496 h3

## Silkscreen, mask and mechanical layers (free items; w line width, h text height)
Top Overlay:
  circle w1: c49.8,50.1 r2.7
  circle w1: c50,10 r2.7
  circle w1: c10,50 r2.7
  circle w1: c90,50 r2.7
  circle w1: c50,90 r2.7
  region: 33.507,64.973 ccw(c31.918,68.969) 34.313,65.397 ccw(c29.997,66.276) 34.099,67.88 cw(c31.9,70.75) 33.606,67.563 cw(c30.22,66.395)
  region: 35.07,66.375 ccw(c32.126,66.312) 34.529,68.014 cw(c35.485,65.904) 37.164,67.5 ccw(c37.087,65.132)
  region: 30.737,64.834 ccw(c31.918,68.969) 31.326,64.71 ccw(c29.292,66.414) 31.845,67.135 cw(c31.9,70.75) 31.227,67.198 cw(c28.524,66.527)
  region: 31.932,64.669 ccw(c31.918,68.969) 32.56,64.717 ccw(c29.889,66.645) 33.109,67.343 cw(c31.9,70.75) 32.503,67.186 cw(c29.414,66.563)
  region: 33.991,69.222 cw(c34.576,71.287) 33.225,69.62 33.225,68.664
  region: 35.418,68.4 ccw(c32.633,68.921) 31.733,71.607 cw(c31.516,67.636)
  region: 30.144,67.314 cw(c33.068,67.841) 32.497,70.756 ccw(c34.576,71.287) 32.961,69.875 ccw(c32.807,67.215)
  region: 30.208,71.242 30.089,71.886 cw(c30.087,71.891) 30.082,71.891 cw(c30.593,71.933) 31.106,71.933 cw(c31.1,71.933) 31.106,71.933 cw(c30.593,71.933) 31.106,71.922 31.106,71.933 ccw(c30.593,71.933) 31.106,71.933 31.106,71.922 31.102,71.539 ccw(c31.096,71.539) 31.102,71.539 cw(c31.096,71.539) 31.098,71.534 30.215,71.238 cw(c30.213,71.243)
  region: 30.256,65.003 cw(c31.918,68.969) 29.394,65.488 cw(c31.601,68.128) 29.913,71.127 ccw(c32.5,68.2)
  lines w0.01: 30.085,71.933 30.213,71.243 31.096,71.539 31.1,71.933 ; 30.087,71.891 cw(c30.593,71.933) 31.098,71.882
  lines w0.127: 29.394,65.488 ccw(c31.918,68.969) 30.256,65.003 cw(c32.5,68.2) 29.913,71.127 ccw(c31.601,68.128) 29.394,65.488 ; 30.144,67.314 cw(c32.807,67.215) 32.961,69.875 cw(c34.576,71.287) 32.497,70.756 ccw(c33.068,67.841) 30.144,67.314 ; 30.737,64.834 ccw(c28.524,66.527) 31.227,67.198 ccw(c31.9,70.75) 31.845,67.135 cw(c29.292,66.414) 31.326,64.71 cw(c31.918,68.969) 30.737,64.834 ; 31.733,71.607 cw(c32.633,68.921) 35.418,68.4 ccw(c31.516,67.636) 31.733,71.607 ; 31.932,64.669 ccw(c29.414,66.563) 32.503,67.186 ccw(c31.9,70.75) 33.109,67.343 cw(c29.889,66.645) 32.56,64.717 cw(c31.918,68.969) 31.932,64.669 ; 33.225,68.664 33.991,69.222 cw(c34.576,71.287) 33.225,69.62 33.225,68.664 ; 33.507,64.973 ccw(c30.22,66.395) 33.606,67.563 ccw(c31.9,70.75) 34.099,67.88 cw(c29.997,66.276) 34.313,65.397 cw(c31.918,68.969) 33.507,64.973 ; 34.529,68.014 cw(c32.126,66.312) 35.07,66.375 cw(c37.087,65.132) 37.164,67.5 ccw(c35.485,65.904) 34.529,68.014
  lines w0.5: 11,25 11,39.069 ; 11,25.4 11,23.749 ccw(c13.049,23.749) 11.6,22.3 ccw(c13.531,24.231) 13.531,21.5 22.8,21.5 53.8,21.5 54.13,21.5 ccw(c54.13,24.566) 56.298,22.398 57.002,23.102 ccw(c54.834,25.27) 57.9,25.27 57.9,26.7 ; 11,38.3 11,39.469 cw(c13.731,39.469) 11.8,41.4 cw(c13.731,39.469) 13.731,42.2 14.17,42.2 17.6,42.2 ; 36.8,42.4 54.63,42.4 cw(c54.63,39.334) 56.798,41.502 57.002,41.298 cw(c54.834,39.13) 57.9,39.13
  text "AUTONOMUS TECHNOLOGIES / LABORATORY" at 41.256,62.914 h3
  text "LANDING-STATION V 1.0 / E.Shaghaei@innopolis.university" at 28.687,58.396 h3
  text "TESTPOINTS" at 18.5,49.7 h3
  text "DOUT" at 18.998,48.876 h3 r270
  text "GND" at 33.713,47.226 h3 r270
  text "VCC" at 23.902,47.2 h3 r270
  text "DIN" at 28.805,45.988 h3 r270
  text "INPUT" at 91.654,44.254 h1.52
  text "OUTPUT" at 0.854,44.054 h1.52
  text "GND / VCC / DIN" at 90.683,36.6 h3
  text "GND / VCC / DOUT" at 0.854,36.4 h3
  text "GND / SWCLK / SWDIO / 3V3" at 60.2,29.2 h0.6
  text "CAUTION" at 16.732,12.271 h6.5
  text "HIGH-INTENSITY  / VISIBLE LIGHT /  EXPOSURE" at 13.939,1.6 h4
Mechanical 1:
  lines w0.5: 100,9.144 100,0 ; 100,0 100,100 0,100 0,0 100,0

## Dimensions
50,90 to 0,100 on Top Overlay
10,50 to 0,100 on Top Overlay
10,50 to 90,50 on Top Overlay
50,90 to 50,10 on Top Overlay